# Altium PCB Carduino.PcbDoc
Units mm, origin at the board's own origin, x right, y up, seen from the top; angles counter-clockwise.
Board outline 85 x 55 mm, 2 copper layers (Top Layer, Bottom Layer); 29 components, 41 nets, 161 pads, 42 vias.
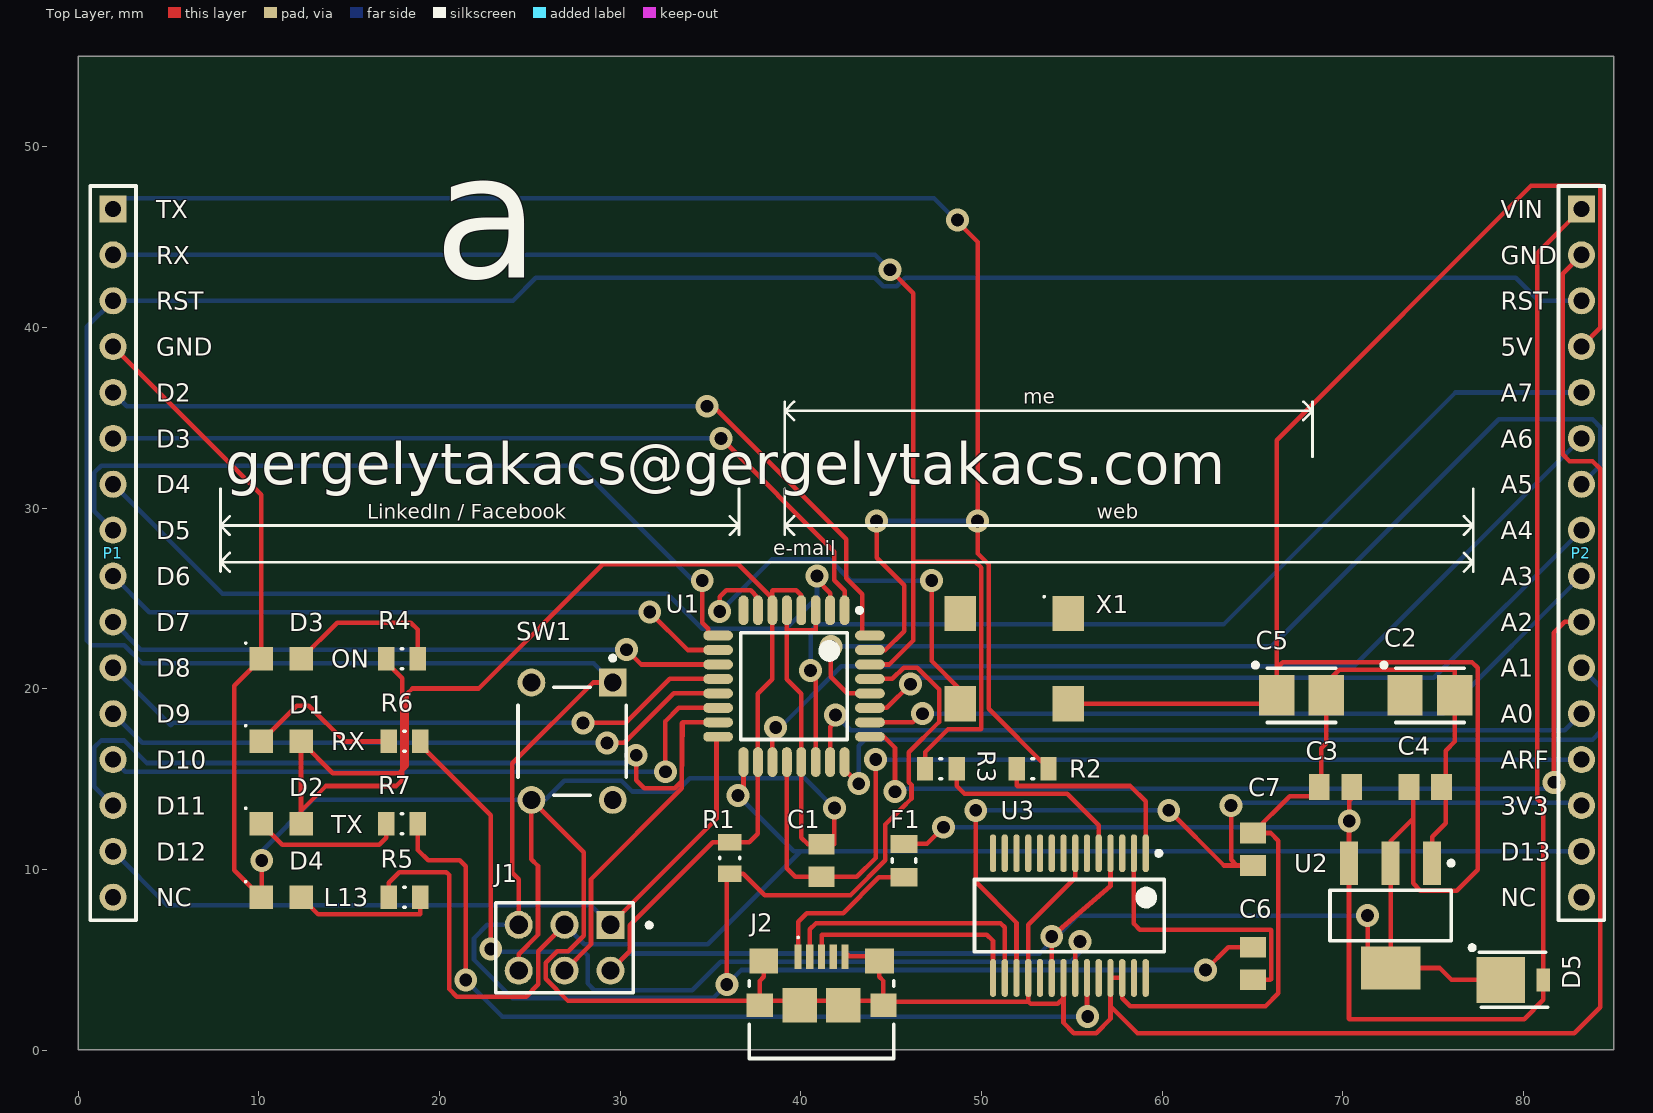
[diagram p0: Top Layer view]
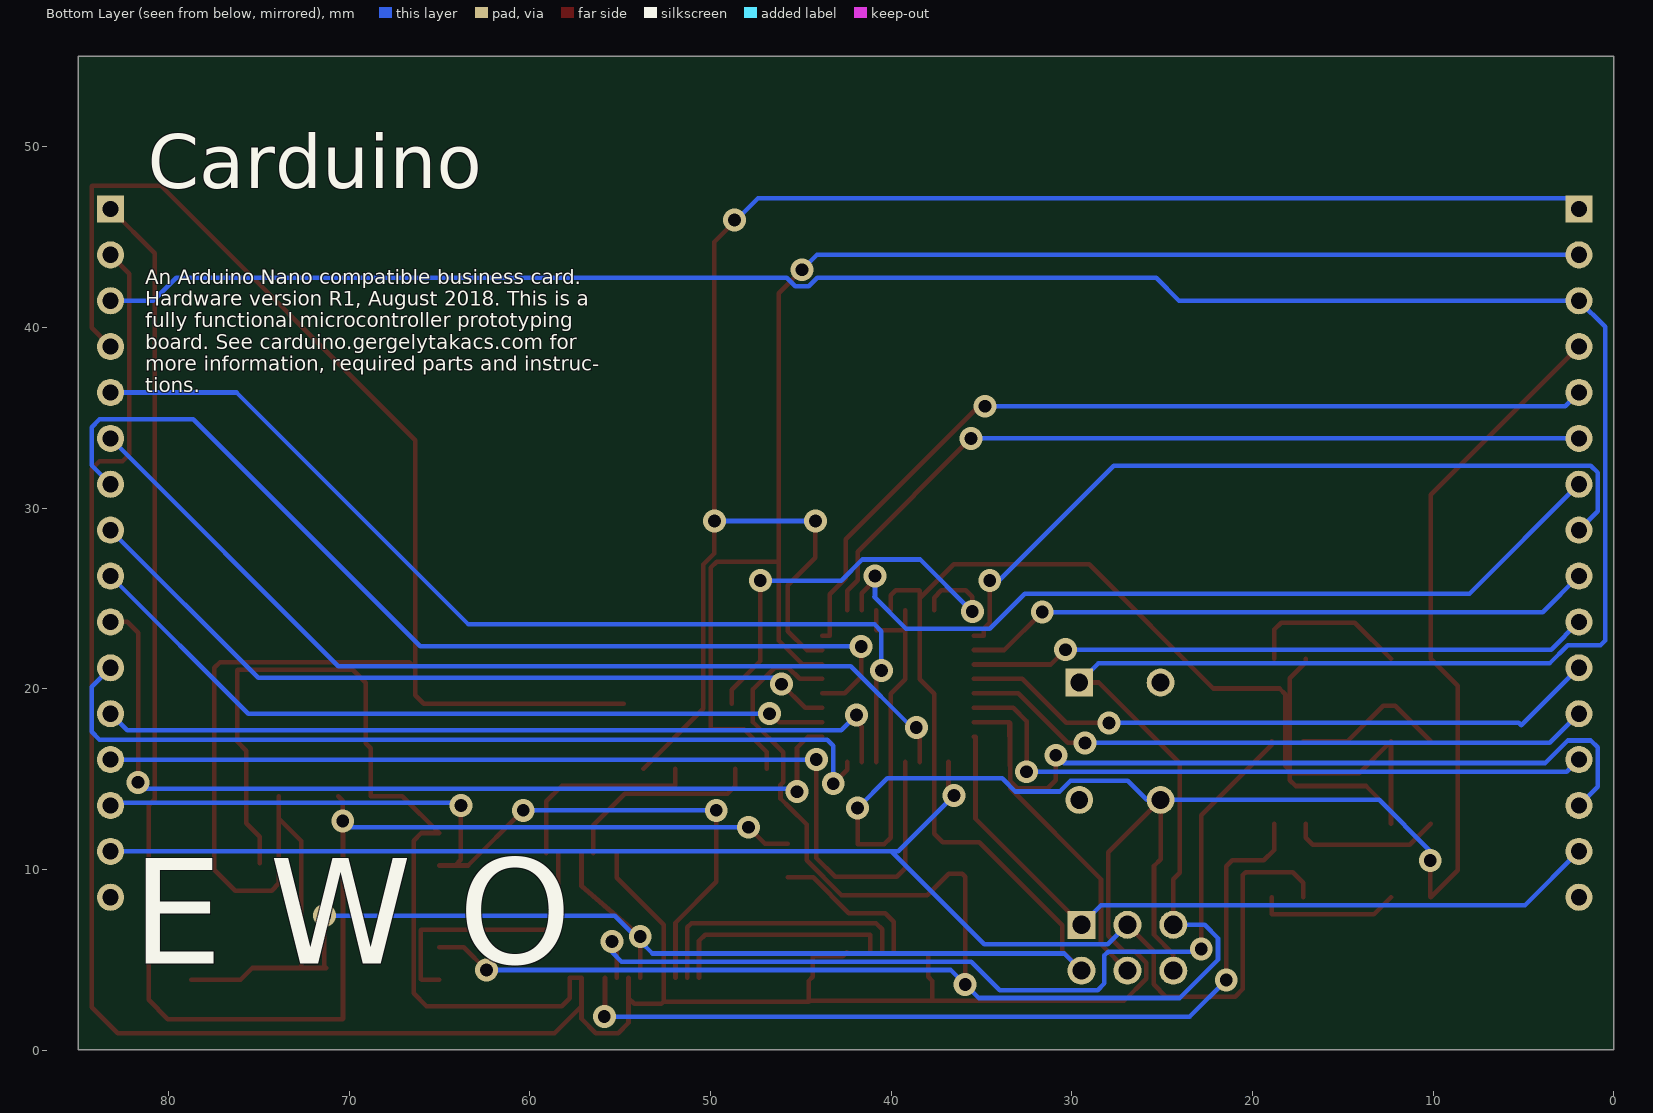
[diagram p1: Bottom Layer view, seen from below]

## Layer stack, top to bottom
Top Solder: solder mask 0.0102, Solder Resist, Dk 3.5
Top Layer: signal copper 0.0356
Dielectric 1: dielectric 0.32, FR-4, Dk 4.8
Bottom Layer: signal copper 0.0356
Bottom Solder: solder mask 0.0102, Solder Resist, Dk 3.5

## Board outline
0,0.013 85,0.013 85,55.013 0,55.013

## Design rules (kind name [scope] priority, off if disabled: settings)
Clearance PCBWay [All] p1: gap=0.152 ignorepadtopadclearanceinfootprint=FALSE except(0: Arc-Hole Track-Hole SMDPad-Hole THPad-Hole Via-Hole Fill-Hole Poly-Hole Region-Hole Text-Hole) // PCBWay Design Rules
HoleSize [All] p1: absolutevalues=TRUE maxlimit=6.3 minlimit=0.03 maxpercent=80.000 minpercent=20.000
MinimumAnnularRing [All] p1: minimumring=0.15
MinimumSolderMaskSliver MinimumSolderMaskSliver_1 [All] p1: minsoldermaskwidth=0.1
PolygonConnect [All] p1: connectstyle=Relief reliefconductorwidth=0.254 reliefentries=4 polygonreliefangle="90 Angle" airgapwidth=0.254
RoutingVias [All] p1: holewidth=0.711 width=1.27 viastyle="Through Hole" minholewidth=0.711 minwidth=1.27 maxholewidth=0.711 maxwidth=1.27
SilkToSolderMaskClearance [IsPad] p1: minsilkscreentomaskgap=0.15 clearancetoexposedcopper=TRUE
SolderMaskExpansion [All] p1: expansion=0.075
Width [All] p1: maxlimit=0.5 minlimit=0.15 preferedwidth=0.254 minimp=50.000000 maximp=50.000000 favimp=50.000000
27 further rules are at their usual default settings.

## Components (designator, comment, footprint, x,y, rotation, side; value= is the part's Value field where it differs from the comment)
C1 "100nF" CAPC2013X09N 41.148,10.49 r90 top
C2 "4.7uF" "CAP body B" 74.825,19.634 r0 top
C3 "100nF" CAPC2013X09N 69.596,14.554 r0 top
C4 "100nF" CAPC2013X09N 74.56,14.554 r0 top
C5 "4.7uF" "CAP body B" 67.713,19.634 r0 top
C6 "100nF" CAPC2013X09N 65.024,4.786 r90 top
C7 "100nF" CAPC2013X09N 65.024,11.114 r270 top
D1 "OSXX0805C1E" DIOC2012X09N 11.233,17.094 r0 top
D2 "OSXX0805C1E" DIOC2012X09N 11.233,12.522 r0 top
D3 "OSXX0805C1E" DIOC2012X09N 11.233,21.666 r0 top
D4 "OSXX0805C1E" DIOC2012X09N 11.233,8.458 r0 top
D5 "SS1P3L-M3/84A" DIOM3420X11N 80.084,3.886 r0 top
F1 "ECE SR050-06" RESC2113X12N 45.72,10.49 r90 top
J1 "Conn_3M_961206-6404-AR_eec" 3M_961206-6404-AR_0 26.924,5.664 r180 top
J2 "1981568-1" TECO-1981568-5_V 41.148,5.156 r0 top
P1 "Header 16" HDR1X16 1.93,46.558 r270 top locked
P2 "Header 16" HDR1X16 83.21,46.558 r270 top locked
R1 "1 k" RESC2112X05N 36.068,10.631 r270 top
R2 "1 k" RESC2112X05N 52.832,15.57 r180 top
R3 "1 k" RESC2112X05N 47.752,15.57 r180 top
R4 "270 Ohm, 0805" RESC2112X05N 17.921,21.666 r0 top
R5 "270 Ohm, 0805" RESC2112X05N 18.062,8.458 r0 top
R6 "270 Ohm, 0805" RESC2112X05N 18.062,17.094 r0 top
R7 "270 Ohm, 0805" RESC2112X05N 17.921,12.522 r0 top
SW1 "Switch_TE_1825910-7_eec" TE_1825910-7_0 27.337,17.094 r270 top
U1 "ATmega328P-AU" 32A_N 39.624,20.142 r270 top
U2 "LD1117S50TR" SOT-223_N 72.644,7.442 r270 top
U3 "FT232RL-Reel" SSOP-28_N 54.864,7.442 r270 top
X1 "16 MHz" DFN598P720X140-4N 51.816,21.666 r180 top

## Footprints (in the part's own frame and the unit in brackets; to place one, negate y for a bottom-side part, rotate by r counter-clockwise, add the part's x,y. Pads: shape width x height; smd on the part's side, far side on the other; paste and mask are expansions set on the pad)
3M_961206-6404-AR_0 [mm]
  rect 1.55x1.55 hole 1 paste-1000 mask+0: 1(-2.54,-1.27)
  round 1.55 hole 1 paste-1000 mask+0: 2(-2.54,1.27) 3(0,-1.27) 4(0,1.27) 5(2.54,-1.27) 6(2.54,1.27)
  silkscreen extent -4.81,-2.5 3.81,2.5, body extent -3.81,-2.57 3.81,2.51, height 8.47
32A_N [mm] "Thin QFP, 32-Leads, Body 7x7mm, Pitch 0.8mm, IPC Medium Density"
  oval 1.65x0.55 smd: 1(-4.2,2.8) 2(-4.2,2) 3(-4.2,1.2) 4(-4.2,0.4) 5(-4.2,-0.4) 6(-4.2,-1.2) 7(-4.2,-2) 8(-4.2,-2.8) 17(4.2,-2.8) 18(4.2,-2) 19(4.2,-1.2) 20(4.2,-0.4) 21(4.2,0.4) 22(4.2,1.2) 23(4.2,2) 24(4.2,2.8)
  oval 0.55x1.65 smd: 9(-2.8,-4.2) 10(-2,-4.2) 11(-1.2,-4.2) 12(-0.4,-4.2) 13(0.4,-4.2) 14(1.2,-4.2) 15(2,-4.2) 16(2.8,-4.2) 25(2.8,4.2) 26(2,4.2) 27(1.2,4.2) 28(0.4,4.2) 29(-0.4,4.2) 30(-1.2,4.2) 31(-2,4.2) 32(-2.8,4.2)
  silkscreen extent -4.32,-2.95 2.95,3.75, body extent -3.5,-3.5 3.5,3.5, height 1.2
"CAP body B" [mm] "Molded Capacitor, 2-Leads, Body 3.50x2.80mm, IPC Medium Density"
  rect 1.95x2.25 smd: 1(-1.375,0) 2(1.375,0)
  silkscreen extent -2.67,-1.5 1.9,1.8, body extent -1.8,-1.5 1.9,1.5, height 2.11
CAPC2013X09N [mm] "Chip Capacitor, 2-Leads, Body 2.00x1.30mm, IPC Medium Density"
  rect 1.15x1.45 smd: 1(-0.9,0) 2(0.9,0)
  body extent -1.1,-0.72 1.1,0.72, height 0.88
DFN598P720X140-4N [mm] "DFN, 4-Leads, Body 5.20x7.20mm, Pitch 5.98mm, IPC Medium Density"
  rect 1.75x1.95 smd: 1(-2.99,-2.5) 2(2.99,-2.5) 3(2.99,2.5) 4(-2.99,2.5)
  silkscreen extent -1.7,-3.48 -1.6,-3.38, body extent -3.43,-2.54 3.57,2.46, height 1.51
DIOC2012X09N [mm] "Chip Diode, 2-Leads, Body 2.00x1.25mm, IPC Medium Density"
  rect 1.3x1.3 smd: 1(-1.1,0) 2(1.1,0)
  silkscreen extent -2.01,0.81 -1.91,0.91, body extent -1.05,-0.67 1.05,0.68, height 0.9
DIOM3420X11N [mil] "Molded Diode, 2-Leads, Body 3.40x2.03mm, IPC Medium Density"
  rect 105.12x100 smd: 1(-52.91,0)
  rect 30x50 smd: 2(40,0)
  silkscreen extent -120,-60 50,75, body extent -110,-46 61,40, height 46
HDR1X16 [mm] "Connector; Header; 16 Position"
  rect 1.5x1.5 hole 0.9: 1(0,0)
  round 1.5 hole 0.9: 2(2.54,0) 3(5.08,0) 4(7.62,0) 5(10.16,0) 6(12.7,0) 7(15.24,0) 8(17.78,0) 9(20.32,0) 10(22.86,0) 11(25.4,0) 12(27.94,0) 13(30.48,0) 14(33.02,0) 15(35.56,0) 16(38.1,0)
  silkscreen extent -1.27,-1.27 39.37,1.27
RESC2112X05N [mm] "Chip Resistor, 2-Leads, Body 2.05x1.25mm, IPC Medium Density"
  rect 0.9x1.3 smd: 1(-0.875,0) 2(0.875,0)
  silkscreen extent -0.05,-0.55 0.05,0.55, body extent -1.1,-0.7 1.1,0.7, height 0.45
RESC2113X12N [mm] "Chip Resistor, 2-Leads, Body 2.10x1.35mm, IPC Medium Density"
  rect 1x1.5 smd: 1(-0.925,0) 2(0.925,0)
  silkscreen extent -0.1,-0.65 0.1,0.65, body extent -1.1,-0.75 1.1,0.75, height 1.25
SOT-223_N [mm] "SOT223, 4-Leads, Body 6.5x3.5mm, Pitch 2.3mm, Lead Span 7mm, IPC Medium Density"
  rect 2.4x1 smd: 1(-2.9,2.3) 2(-2.9,0) 3(-2.9,-2.3)
  rect 2.4x3.3 smd: 4(2.9,0)
  silkscreen extent -3.02,-3.35 1.4,3.48, body extent -1.85,-3.35 1.85,3.35, height 1.8
SSOP-28_N [mm] "SOP, 28-Leads, Body 10.2x5.3mm, Pitch 0.65mm, IPC Medium Density"
  oval 2.1x0.35 smd: 1(-3.45,4.225) 2(-3.45,3.575) 3(-3.45,2.925) 4(-3.45,2.275) 5(-3.45,1.625) 6(-3.45,0.975) 7(-3.45,0.325) 9(-3.45,-0.975) 10(-3.45,-1.625) 11(-3.45,-2.275) 12(-3.45,-2.925) 13(-3.45,-3.575) 14(-3.45,-4.225) 15(3.45,-4.225) 16(3.45,-3.575) 17(3.45,-2.925) 18(3.45,-2.275) 19(3.45,-1.625) 20(3.45,-0.975) 21(3.45,-0.325) 22(3.45,0.325) 23(3.45,0.975) 24(3.45,1.625) 25(3.45,2.275) 26(3.45,2.925) 27(3.45,3.575) 28(3.45,4.225)
  oval 2.1x0.35 smd mask+0.102: 8(-3.45,-0.325)
  silkscreen extent -3.57,-5.25 2,5.25, body extent -2.8,-5.25 2.8,5.25, height 2
TE_1825910-7_0 [mm]
  rect 1.54x1.54 hole 0.99 paste-1000 mask+0: 1(-3.25,2.25)
  round 1.54 hole 0.99 paste-1000 mask+0: 2(3.25,2.25) 3(-3.25,-2.25) 4(3.25,-2.25)
  silkscreen extent -4.72,-3 3,3, body extent -3.95,-3.1 3.95,3.1, height 7
TECO-1981568-5_V [mm] "SMD, 5-Leads, Body 8x5.9mm, Pitch 0.65mm"
  rect 0.4x1.35 smd: 1(-1.3,0) 2(-0.65,0) 3(0,0) 4(0.65,0) 5(1.3,0)
  rect 1.6x1.4 smd: 6(-3.2,-0.225) 7(3.2,-0.225)
  rect 1.45x1.3 smd: 8(-3.425,-2.675) 9(3.425,-2.675)
  rect 1.9x1.9 smd: 10(-1.2,-2.675) 11(1.2,-2.675)
  silkscreen extent -4,-5.62 4,1.12, body extent -4.3,-5.42 4.35,0.48, height 2.74

## Part data
C1 C3 C4 C6 C7: library part "100 uF,  ceramic, 0805, Kemet", "Ceramic condenser MLCC; 100nF; 25V; X7R; ±10%; SMD; 0805"
C2 C5: library part "4.7uF, Tantallum", "4,7uF; 25VDC; SMD; Puzd: B; ±10%; -55÷125°C"
D1 D2 D3 D4: library part "OptoSupply RED", "OptoSupply Single Chip LED 0805", CREATOR="Gergely Takacs", CREATOR WWW=http://www.gergelytakacs.com, DATASHEET URL=https://www.tme.eu/sk/Document/6f99baddc8b38eb1a865ea6b78250b2b/OSXX0805C1E-DTE.pdf
D5: library part SS1P3L, "VISHAY SS1P3L-M3/84A  Dióda: usmeròovacia Schottky; SMD; 30V; 1A; DO220AA, SMP"
F1: "FUSE PTC RESETTABLE .50A"
J1: "CONN HEADER VERT DUAL 6POS GOLD", Digikey Part Number=3M9466-06-ND, Manufacturer=3M, Mouser Part Number=517-9612066404AR, Package=HDR6, Part Number="ICSP Header", Temperature="-25°C to +105°C", Temperature Range High=+105°C, Temperature Range Low=-25°C, ComponentLink1Description=Upverter, ComponentLink1URL=https://upverter.com/upn/revision/048db89806b755ca/, ComponentLink2Description=Datasheet, ComponentLink2URL=https://media.digikey.com/pdf/Data%20Sheets/3M%20PDFs/961_Series.pdf, Digikey Description="CONN HEADER VERT DUAL 6POS GOLD", helpURL=https://upverter.com/upn/revision/048db89806b755ca/, Lead Free=yes, Price=0.298634614737, RoHS=TRUE, Supplier 1=Digi-Key, Supplier 2=Mouser, Supplier Part Number 1=3M9466-06-ND, Supplier Part Number 2=517-9612066404AR
J2: "Micro USB Receptacle Standard Type B Assy, 5-Pin SMD, RoHS, Tape and Reel", Current Rating (Max)=1/ContactA, Manufacturer="TE Connectivity", Operating Temperature Max Deg. C=85C, Operating Temperature Min Deg. C=-55C, Operating Temp Range=-55Cto85C, Voltage Rating Max=30VAC, Body Orientation=RightAngle, Contact Material=CopperAlloy, Contact Plating=GoldOverNickel, DATASHEET URL=http://www.mouser.com/ds/2/418/NG_CD_1981568_E2-621296.pdf, Datasheet Version="Rev. E2, 08/2015", Gender=RCP, Housing Material=Thermoplastic, Manufacturer URL=http://www.te.com/, Mounting Style=SurfaceMount, Number of Contacts=5POS, Number of Ports=1Port, Number of Terminals=5, Packaging=TapeandReel, PartNumber=1981568-1, Pitch (mm)=0.65mm, Product Depth (mm)=5.6mm, Product Height (mm)=3mm, Product Length (mm)=8mm, Termination Method=Solder, Type=MicroUSB
P1 P2: "Header, 16-Pin", LatestRevisionDate=17-Jul-2002, LatestRevisionNote="Re-released for DXP Platform.", Publisher="Altium Limited"
R1 R2 R3: library part "1k, 0805, Royal Ohm", "ROYAL OHM HP05W3F1001T5E  Rezistor: thick film; vysokovýkonný; SMD; 0805; 1k?; 0,3W; ±1%"
R4 R5 R6 R7: library part "270 Ohm, 0805, Resistor", "VISHAY CRCW...BC Thick Film Commodity Resistor"
SW1: "SWITCH Tactile Switch SPST-NO Top Actuated Through Hole", Contact Rating @ Voltage="0.05A @ 24VDC", Digikey Part Number=450-1804-ND, Manufacturer=TE, Mouser Part Number=506-FSM4JAH, Operating Force=260gf, Package="Through Hole", Part Number=1825910-7, Temperature="-35°C to +85°C", Temperature Range High=+85°C, Temperature Range Low=-35°C, Actuator Height off PCB, Vertical=5.00mm, Actuator Material="Polybutylene Terephthalate (PBT)", Actuator Orientation="Top Actuated", Actuator Type=Standard, Circuit=SPST-NO, ComponentLink1Description=Upverter, ComponentLink1URL=https://upverter.com/upn/revision/149b3552d7425f0e/, ComponentLink2Description=Datasheet, ComponentLink2URL=http://www.te.com/commerce/DocumentDelivery/DDEController?Action=srchrtrv&DocNm=1825910&DocType=Customer+Drawing&DocLang=English, Digikey Description="SWITCH Tactile Switch SPST-NO Top Actuated Through Hole", helpURL=https://upverter.com/upn/revision/149b3552d7425f0e/, Illumination=Non-Illuminated, Lead Free=yes, Mechanical Life="100,000 Cycles", Mounting Type="Through Hole", Outline="6.00mm x 6.00mm", RoHS=TRUE, Supplier 1=Digi-Key, Supplier 2=Mouser, Supplier Part Number 1=450-1804-ND, Supplier Part Number 2=506-FSM4JAH, Switch Function=Off-Mom, Switch Travel=0.25mm, Termination Style="PC Pin"
U1: "8-bit AVR Microcontroller, 32KB Flash, 1KB EEPROM, 2KB SRAM, 32-pin TQFP, Industrial Grade (-40°C to 85°C)", Code_JEDEC=MS-026-ABA, ComponentLink1Description="Manufacturer URL", ComponentLink1URL=http://www.atmel.com/, ComponentLink2Description="ATmega48A/48PA/88A/88PA/168A/168PA/328/328P Datasheet", ComponentLink2URL=http://www.atmel.com/dyn/resources/prod_documents/doc8271.pdf, ComponentLink3Description="ATmega48A/48PA/88A/88PA/168A/168PA/328/328P Summary", ComponentLink3URL=http://www.atmel.com/dyn/resources/prod_documents/8271S.pdf, DatasheetVersion="revD, May-2011", PackageDescription="32-Lead, 7x7x1.0 mm Body, 0.8mm Lead Pitch, Thin Profile Plastic Quad Flat Package (TQFP)", PackageReference=32A, PackageVersion="revC, Oct-2010"
U2: "Fixed Low Drop Positive Voltage Regulator, 5V, 4-Pin SOT-223, Tape and Reel", ComponentLink1Description="Manufacturer URL", ComponentLink1URL=http://www.st.com, ComponentLink2Description=Datasheet, ComponentLink2URL=http://www.st.com/internet/com/TECHNICAL_RESOURCES/TECHNICAL_LITERATURE/DATASHEET/CD00000544.pdf, DatasheetVersion=Nov-2011, PackageDescription="4-Pin SOT-223 Package, 6.5 x 3.5 mm Body, 2.3 mm Pitch, 7 mm Lead Span", PackageReference=SOT-223, PackageVersion=2010, PartNumber=LD1117S50TR
U3: "USB UART Asynchronous Serial Data Transfer Chip, 28-pin SSOP, Tape and Reel", Manufacturer=FTDI, ComponentLink1Description="Manufacturer URL", ComponentLink1URL=http://www.ftdichip.com/, ComponentLink2Description=Datasheet, ComponentLink2URL=http://www.ftdichip.com/Support/Documents/DataSheets/ICs/DS_FT232R.pdf, DatasheetVersion="ver 2.10, Mar-2012", PackageDescription="28-Pin Small Outline Package 0.65 mm Pitch", PackageReference=SSOP-28, PackageVersion=Mar-12, PartNumber=FT232RL-Reel
X1: library part "16 MHz, IQD FREQUENCY PRODUCTS", "QD FREQUENCY PRODUCTS LF SPXO018034"

## Via types
v1: diameter 1.27, hole 0.711, Top Layer to Bottom Layer, 42 vias

## Nets (pads, with @x,y where several pads share a name; then routed paths per layer and width w, separated by ;. In a path a pad name is that pad's centre, name@x,y a point inside that pad or via, vN(x,y) a via of type N, cw(c..) or ccw(c..) an arc to the next point about the centre after c; other vN are vias at no path point)
3V3: C7.2 P2.14 U3.17 | length 49.8
  Top Layer w0.254: v1(49.682,13.271) 49.682,9.309 51.939,7.053 U3.17 ; v1(60.367,13.271) 63.424,10.214 64.135,10.214 ; v1(63.817,13.538) 63.817,10.532 64.135,10.214 ; C7.2 64.135,10.214
  Bottom Layer w0.254: v1(49.682,13.271) v1(60.367,13.271) ; v1(63.817,13.538) 63.97,13.691 83.058,13.691 P2.14
5V: C4.1 C5.1 D1.2 D2.2 D5.1 J1.2 P2.4 R1.1 R4.1 U1.4 U1.6 U1.18 U2.2 U2.4 U3.4 U3.20 X1.4 | length 243
  Top Layer w0.254: D2.2 12.333,13.235 ; R4.1 17.046,21.476 17.932,20.589 17.932,15.481 ; J1.2 30.531,5.461 30.531,6.909 35.128,11.506 R1.1 37.148,11.506 37.624,11.983 U1.18 37.624,19.723 38.424,20.523 U1.6 U1.6@38.424,25.012 ; U1.4 40.024,25.174 39.751,25.447 38.456,25.447 38.424,25.415 U1.6@38.424,25.012 ; U3.20 v1(53.889,6.286) 57.139,9.08 U3.4 ; X1.4 65.87,19.166 C5.1 66.338,21.139 ; v1(71.374,7.442) 71.374,4.644 71.272,4.542 U2.4 ; C4.1@73.892,14.046 73.892,12.818 ; D5.1 76.018,3.886 75.362,4.542 U2.4 ; P2.4 84.252,39.98 84.252,47.816 84.226,47.841 80.416,47.841 66.338,33.762 66.338,21.139 ; 12.333,13.235 13.716,14.618 17.615,14.618 17.932,14.935 17.932,15.481 ; 12.333,13.235 D1.2 14.098,15.329 17.78,15.329 17.932,15.481 ; 17.932,15.481 18.186,15.735 18.186,19.698 18.504,20.015 22.162,20.015 29.045,26.899 36.538,26.899 U1.6@38.424,25.012 ; 66.338,21.139 66.675,21.476 77.153,21.476 77.47,21.158 77.47,9.982 76.314,8.826 74.295,8.826 73.892,9.229 73.892,12.818 ; U2.4 U2.2 72.644,11.57 73.892,12.818
  Bottom Layer w0.254: J1.2 30.416,5.347 53.213,5.347 v1@53.889,6.023 ; v1(53.889,6.286) v1@53.889,6.023 ; v1(71.374,7.442) 55.308,7.442 v1@53.889,6.023
A0: P2.12 U1.23 | length 44.8
  Top Layer w0.254: U1.23 41.624,17.9 41.91,18.186 v1(41.91,18.555)
  Bottom Layer w0.254: v1(41.91,18.555) 42.761,17.704 82.296,17.704 P2.12
A1: P2.11 U1.24 | length 49
  Top Layer w0.254: U1.24 42.424,15.526 v1(43.205,14.745)
  Bottom Layer w0.254: v1(43.205,14.745) 43.205,16.84 43.548,17.183 83.82,17.183 84.252,17.615 84.252,20.117 P2.11
A2: P2.10 U1.25 | length 50.8
  Top Layer w0.254: U1.25 44.602,17.342 45.212,16.733 v1(45.212,14.3) ; v1(81.686,14.821) 81.686,23.089 82.296,23.698 P2.10
  Bottom Layer w0.254: v1(45.212,14.3) 45.364,14.453 81.318,14.453 v1(81.686,14.821)
A3: P2.9 U1.26 | length 42.7
  Top Layer w0.254: U1.26 46.197,18.142 46.672,18.618 v1(46.736,18.618)
  Bottom Layer w0.254: v1(46.736,18.618) 75.59,18.618 P2.9
A4: P2.8 U1.27 | length 43.5
  Top Layer w0.254: U1.27 44.761,18.942 v1(46.069,20.25)
  Bottom Layer w0.254: v1(46.069,20.25) 46.431,20.612 75.044,20.612 P2.8
A5: P2.7 U1.28 | length 55.8
  Top Layer w0.254: v1(41.658,22.342) 41.658,20.66 42.577,19.742 U1.28
  Bottom Layer w0.254: v1(41.658,22.342) 66.068,22.342 78.638,34.912 83.82,34.912 84.252,34.48 84.252,32.36 P2.7
A6: P2.6 U1.19 | length 53.2
  Top Layer w0.254: U1.19 38.424,17.431 38.608,17.615 v1(38.608,17.856)
  Bottom Layer w0.254: v1(38.608,17.856) 38.849,17.856 42.24,21.247 70.599,21.247 P2.6
A7: P2.5 U1.22 | length 55.5
  Top Layer w0.254: v1(40.538,21.018) 40.824,20.733 U1.22
  Bottom Layer w0.254: v1(40.538,21.018) 40.538,23.19 40.907,23.559 63.399,23.559 76.238,36.398 P2.5
AREF: C1.1 P2.13 U1.20 | length 55.9
  Top Layer w0.254: U1.20 39.224,10.054 39.688,9.59 C1.1 43.104,9.59 44.144,10.63 v1(44.144,16.078)
  Bottom Layer w0.254: v1(44.144,16.078) P2.13
D0/RX: P1.2 R3.2 U1.30 | length 84.7
  Top Layer w0.254: U1.30 44.901,21.342 46.228,22.669 46.228,27.038 ; v1(44.933,43.193) 46.228,41.897 46.228,27.038 ; R3.2 46.877,16.497 48.147,17.767 49.962,17.767 49.987,17.793 49.987,26.708 49.657,27.038 46.228,27.038
  Bottom Layer w0.254: P1.2 44.107,44.018 v1(44.933,43.193)
D1/TX: P1.1 R2.1 U1.31 | length 94.6
  Top Layer w0.254: U1.31 44.672,22.142 45.72,23.19 45.72,25.73 44.196,27.254 v1(44.196,29.286) ; v1(48.679,45.949) 48.679,45.834 49.784,44.729 v1(49.784,29.286) 49.784,27.486 50.394,26.876 50.394,18.884 R2.1
  Bottom Layer w0.254: P1.1 2.515,47.142 47.371,47.142 48.565,45.949 v1(48.679,45.949) ; v1(44.196,29.286) v1(49.784,29.286)
D2: P1.5 U1.32 | length 50.1
  Top Layer w0.254: v1(34.798,35.636) 35.154,35.636 42.52,28.27 42.52,26.124 43.409,25.235 43.409,22.942 U1.32
  Bottom Layer w0.254: P1.5 2.692,35.636 v1(34.798,35.636)
D3: P1.6 U1.1 | length 46
  Top Layer w0.254: v1(35.585,33.858) 41.859,27.584 41.859,25.997 42.424,25.432 U1.1
  Bottom Layer w0.254: P1.6 v1(35.585,33.858)
D4: P1.7 U1.2 | length 46.4
  Top Layer w0.254: v1(40.894,26.238) 40.894,26.022 41.624,25.292 U1.2
  Bottom Layer w0.254: P1.7 7.988,25.26 32.614,25.26 34.544,23.33 39.179,23.33 40.945,25.095 40.894,25.146 v1(40.894,26.238)
D5: P1.8 U1.9 | length 43.8
  Top Layer w0.254: v1(34.544,25.984) 34.544,23.66 34.874,23.33 34.874,22.942 U1.9
  Bottom Layer w0.254: P1.8 0.889,29.82 0.889,31.967 1.27,32.348 27.685,32.348 34.049,25.984 v1(34.544,25.984)
D6: P1.9 U1.10 | length 35.2
  Top Layer w0.254: v1(31.636,24.244) 33.738,22.142 U1.10
  Bottom Layer w0.254: P1.9 3.924,24.244 v1(31.636,24.244)
D7: P1.10 U1.11 | length 34.5
  Top Layer w0.254: v1(30.353,22.162) 31.172,21.342 U1.11
  Bottom Layer w0.254: P1.10 3.467,22.162 v1(30.353,22.162)
D8: P1.11 U1.12 | length 35.9
  Top Layer w0.254: v1(27.94,18.11) 30.309,18.11 32.741,20.542 U1.12
  Bottom Layer w0.254: P1.11 5.118,17.97 5.258,18.11 v1(27.94,18.11)
D9: P1.12 U1.13 | length 35.3
  Top Layer w0.254: v1(29.273,17.005) 30.226,17.005 32.963,19.742 U1.13
  Bottom Layer w0.254: P1.12 3.543,17.005 v1(29.273,17.005)
D10: P1.13 U1.14 | length 36.9
  Top Layer w0.254: v1(32.499,15.405) 32.499,18.189 33.252,18.942 U1.14
  Bottom Layer w0.254: P1.13 2.603,15.405 v1(32.499,15.405)
D11/MOSI: J1.4 P1.14 U1.15 | length 60.4
  Top Layer w0.254: J1.4 28.385,5.855 28.385,9.462 33.414,14.491 33.414,14.884 ; v1(30.886,16.319) 30.886,14.935 31.331,14.491 33.02,14.491 33.414,14.884 ; U1.15 33.468,18.142 ; 33.414,14.884 33.414,18.088 33.468,18.142 ; 33.414,14.884 33.468,18.142
  Bottom Layer w0.254: P1.14 0.889,14.58 0.889,16.751 1.27,17.132 2.54,17.132 3.785,15.888 30.455,15.888 v1(30.886,16.319)
D12/MISO: J1.1 P1.15 U1.16 | length 42.1
  Top Layer w0.254: J1.1 35.331,12.802 35.331,17.342 U1.16
  Bottom Layer w0.254: P1.15 4.915,8.014 28.384,8.014 J1.1
D13/SCK: J1.3 P2.15 R5.1 U1.17 | length 85.6
  Top Layer w0.254: R5.1 17.187,9.253 17.78,9.846 20.38,9.846 20.536,9.69 20.536,3.378 20.955,2.959 24.79,2.959 25.463,3.632 25.463,5.473 J1.3 ; v1(36.525,14.084) 36.824,14.383 U1.17
  Bottom Layer w0.254: J1.3 28.003,5.855 34.849,5.855 39.992,10.998 ; v1(36.525,14.084) 39.611,10.998 39.992,10.998 ; P2.15 39.992,10.998
GND: C1.2 C2.2 C3.1 C4.2 C5.2 C7.1 D3.1 D4.1 J1.6 J2.5 J2.6 J2.7 J2.8 J2.9 J2.10 J2.11 P1.4 P2.2 SW1.4 U1.3 U1.5 U1.21 U2.1 U3.7 U3.18 U3.21 U3.25 U3.26 | length 290.6
  Top Layer w0.254: P1.4 10.133,30.736 D3.1 8.636,20.169 8.636,9.955 D4.1 10.16,8.485 v1(10.16,10.49) ; J1.6 24.384,5.309 25.451,6.376 25.451,10.189 25.087,10.554 SW1.4 27.978,10.952 27.978,6.325 27.13,5.476 26.515,5.476 25.87,4.831 25.87,3.957 27.109,2.718 37.706,2.718 J2.8@37.723,2.735 ; J2.6@37.948,5.185 J2.6 37.948,4.048 37.723,3.823 J2.8@37.723,2.735 ; U1.5 39.224,23.254 ; U1.3 40.824,23.254 40.799,23.228 39.249,23.228 39.224,23.254 ; v1(41.859,13.399) 41.859,11.39 C1.2 40.394,11.39 40.024,11.76 U1.21 40.024,19.723 39.224,20.523 39.224,23.254 ; J2.5@42.448,5.41 42.673,5.185 44.348,5.185 J2.7 44.348,4.048 44.573,3.823 J2.9@44.573,2.735 ; U3.21 54.539,2.87 ; U3.7 55.189,9.538 52.589,6.938 U3.18 52.589,2.68 ; C3.1@68.812,14.046 C3.1@68.812,14.059 ; U2.1 74.944,11.798 75.692,12.546 75.692,16.573 76.2,17.081 C2.2 76.2,21.018 76.175,21.044 69.799,21.044 69.088,20.333 C5.2 69.088,16.977 68.812,16.7 C3.1@68.812,14.059 ; P2.2 82.169,42.977 82.169,32.982 82.55,32.601 83.82,32.601 84.252,32.169 84.252,2.375 82.804,0.927 58.636,0.927 57.139,2.424 ; J2.8@37.723,2.735 J2.9@44.573,2.735 ; J2.9@44.573,2.735 44.573,2.68 50.434,2.68 50.451,2.663 50.827,2.663 50.844,2.68 51.084,2.68 51.101,2.663 51.477,2.663 51.494,2.68 51.734,2.68 51.751,2.663 52.127,2.663 52.144,2.68 52.589,2.68 ; 52.589,2.68 52.716,2.553 54.221,2.553 54.539,2.87 ; 54.539,2.87 54.539,1.515 55.114,0.94 56.351,0.94 57.139,1.728 57.139,2.424 ; 57.139,2.424 U3.25 U3.26 57.789,2.87 58.234,2.426 65.722,2.426 66.435,3.138 66.435,11.594 66.015,12.014 C7.1 67.069,14.059 C3.1@68.812,14.059
  Bottom Layer w0.254: v1(10.16,10.49) 10.16,11.011 12.993,13.844 SW1.4 25.857,13.844 26.91,14.897 30.074,14.897 30.658,14.313 33.122,14.313 33.858,15.05 40.208,15.05 v1(41.859,13.399)
"LED RX": R6.2 U3.22 | length 50.7
  Top Layer w0.254: R6.2 18.937,16.904 22.835,13.006 v1(22.835,5.601) ; U3.22 55.189,5.494 v1@55.448,5.753
  Bottom Layer w0.254: v1(22.835,5.601) 22.987,5.449 27.991,5.449 28.194,5.245 28.194,3.696 28.575,3.315 33.985,3.315 35.56,4.889 54.927,4.889 55.448,5.41 v1@55.448,5.753
  other v1: 55.448,6.007
"LED TX": R7.2 U3.23 | length 48.2
  Top Layer w0.254: R7.2 18.796,11.074 19.367,10.503 21.12,10.503 21.45,10.173 v1(21.45,3.873) ; U3.23 55.839,1.895 v1(55.88,1.854)
  Bottom Layer w0.254: v1(21.45,3.873) 23.47,1.854 v1(55.88,1.854)
NetC6_1: C6.1 U3.2 | length 15.4
  Top Layer w0.254: U3.2 58.439,6.998 58.769,6.667 66.003,6.667 66.028,6.642 66.028,3.924 65.99,3.886 C6.1
NetD1_1: D1.1 R6.1 | length 8.7
  Top Layer w0.254: D1.1 12.102,19.063 12.762,19.063 14.743,17.081 17.187,17.081 R6.1
NetD2_1: D2.1 R7.1 | length 8.3
  Top Layer w0.254: D2.1 11.286,11.369 16.655,11.369 17.046,11.76 R7.1
NetD3_2: D3.2 R4.2 | length 9.1
  Top Layer w0.254: D3.2 14.328,23.661 18.415,23.661 18.796,23.28 R4.2
NetD4_2: D4.2 R5.2 | length 7.9
  Top Layer w0.254: D4.2 13.286,7.506 18.912,7.506 18.937,7.531 R5.2
NetF1_1: F1.1 J2.1 | length 8.6
  Top Layer w0.254: J2.1@39.848,5.41 39.848,7.107 40.322,7.582 42.34,7.582 44.323,9.565 F1.1
NetJ2_2: J2.2 U3.16 | length 15.1
  Top Layer w0.254: J2.2@40.498,5.41 40.498,6.68 40.841,7.023 51.054,7.023 51.289,6.788 U3.16
NetJ2_3: J2.3 U3.15 | length 12.6
  Top Layer w0.254: J2.3@41.148,5.41 41.148,6.363 41.173,6.388 50.296,6.388 50.639,6.045 U3.15
NetU1_7: U1.7 X1.3 | length 24.8
  Top Layer w0.254: v1(35.509,24.27) 35.509,25.095 35.861,25.447 37.218,25.447 37.624,25.04 U1.7 ; v1(47.244,25.984) 47.244,21.534 48.826,19.952 X1.3
  Bottom Layer w0.254: v1(35.509,24.27) 38.392,27.153 41.593,27.153 42.761,25.984 v1(47.244,25.984)
RESET: C6.2 J1.5 P1.3 P2.3 R1.2 SW1.1 U1.29 | length 229.3
  Top Layer w0.254: J1.5 24.384,9.461 24.028,9.817 24.028,15.868 28.504,20.344 SW1.1 ; v1(35.903,3.632) 35.903,9.591 R1.2 36.815,9.756 37.998,8.572 42.748,8.572 44.679,10.503 44.679,12.484 45.58,13.386 45.591,13.386 46.126,13.921 46.126,14.679 45.974,14.831 45.974,16.485 47.65,18.161 47.65,19.962 46.448,21.165 45.69,21.165 45.068,20.542 U1.29 ; v1(62.398,4.432) 63.652,5.686 C6.2
  Bottom Layer w0.254: J1.5 22.644,6.934 21.907,6.197 21.907,4.996 24.021,2.883 35.154,2.883 v1(35.903,3.632) 36.703,4.432 v1(62.398,4.432) ; SW1.1 28.531,21.399 3.556,21.399 2.54,22.415 0.737,22.415 0.483,22.669 0.483,40.03 P1.3 24.066,41.478 25.336,42.748 44.084,42.748 44.554,42.278 45.311,42.278 45.781,42.748 79.566,42.748 80.835,41.478 P2.3
RX: R3.1 U3.5 | length 11.3
  Top Layer w0.254: R3.1 48.627,14.618 49.059,14.186 54.744,14.186 56.489,12.441 U3.5
TX: R2.2 U3.1 | length 11.3
  Top Layer w0.254: R2.2 51.957,14.643 51.982,14.618 58.242,14.618 59.089,13.771 U3.1
VUSB: C3.2 D5.2 F1.2 P2.1 U2.3 | length 94.5
  Top Layer w0.254: F1.2 46.986,11.415 v1(47.902,12.332) ; C3.2@70.612,14.046 70.358,13.792 v1(70.358,12.687) 70.358,12.574 70.612,12.32 70.344,12.052 U2.3 70.344,1.729 70.358,1.714 80.035,1.714 81.1,2.779 D5.2 81.1,13.552 80.759,13.894 80.759,44.106 P2.1
  Bottom Layer w0.254: v1(47.902,12.332) 70.51,12.332 70.612,12.433 v1(70.358,12.687)
pads on no net: C2.1 J2.4 P1.16 P2.16 SW1.2 SW1.3 U1.8 U3.3 U3.6 U3.8 U3.9 U3.10 U3.11 U3.12 U3.13 U3.14 U3.19 U3.24 U3.27 U3.28 X1.1 X1.2

## Silkscreen, mask and mechanical layers (free items; w line width, h text height)
Top Overlay:
  drawing of 85 lines, arcs and shapes, not listed
  text "TX" at 4.318,46.05 h1
  text "VIN" at 78.74,46.05 h1
  text "RX" at 4.318,43.51 h1
  text "GND" at 78.74,43.51 h1
  text "RST" at 4.318,40.97 h1
  text "RST" at 78.74,40.97 h1
  text "a" at 19.685,40.462 h12
  text "GND" at 4.318,38.43 h1
  text "5V" at 78.74,38.43 h1
  text "D2" at 4.318,35.89 h1
  text "A7" at 78.74,35.89 h1
  text "me" at 52.324,35.763 h0.8
  text "D3" at 4.318,33.35 h1
  text "A6" at 78.74,33.35 h1
  text "gergelytakacs@gergelytakacs.com" at 8.128,31.318 h2.3
  text "D4" at 4.318,30.81 h1
  text "A5" at 78.74,30.81 h1
  text "LinkedIn / Facebook" at 16.002,29.413 h0.8
  text "web" at 56.388,29.413 h0.8
  text "D5" at 4.318,28.27 h1
  text "A4" at 78.74,28.27 h1
  text "e-mail" at 38.481,27.381 h0.8
  text "D6" at 4.318,25.73 h1
  text "A3" at 78.74,25.73 h1
  text "D7" at 4.318,23.19 h1
  text "A2" at 78.74,23.19 h1
  text "ON" at 14.006,21.158 h1
  text "D8" at 4.318,20.65 h1
  text "A1" at 78.74,20.65 h1
  text "D9" at 4.318,18.11 h1
  text "A0" at 78.74,18.11 h1
  text "RX" at 14.006,16.586 h1
  text "D10" at 4.318,15.57 h1
  text "ARF" at 78.74,15.57 h1
  text "D11" at 4.318,13.03 h1
  text "3V3" at 78.74,13.03 h1
  text "TX" at 14.006,12.014 h1
  text "D12" at 4.318,10.49 h1
  text "D13" at 78.74,10.49 h1
  text "NC" at 4.318,7.95 h1
  text "L13" at 13.589,7.95 h1
  text "NC" at 78.74,7.95 h1
Bottom Overlay:
  drawing of 86 lines, arcs and shapes, not listed
  text "Carduino" at 81.153,47.701 h3
  text "An Arduino Nano compatible business card. / Hardware version R1, August 2018. This is a / fully functional microcontroller prototyping  / board. See carduino.gergelytakacs.com for / more information, required parts and instruc- / tions." at 81.28,36.398 h0.8
  text "E W O" at 82.042,2.87 h10
Mechanical 1:
  lines w0.2: 80.975,55 82.855,55 ; 85,55 0,55 -0.025,0 85.09,0 85.09,54.91